# Altium PCB project_11.PcbDoc
Units mm, origin at the board's own origin, x right, y up, seen from the top; angles counter-clockwise.
Board outline 67.06 x 46.48 mm, 2 copper layers (Top Layer, Bottom Layer); 21 components, 44 nets, 105 pads, 4 vias.
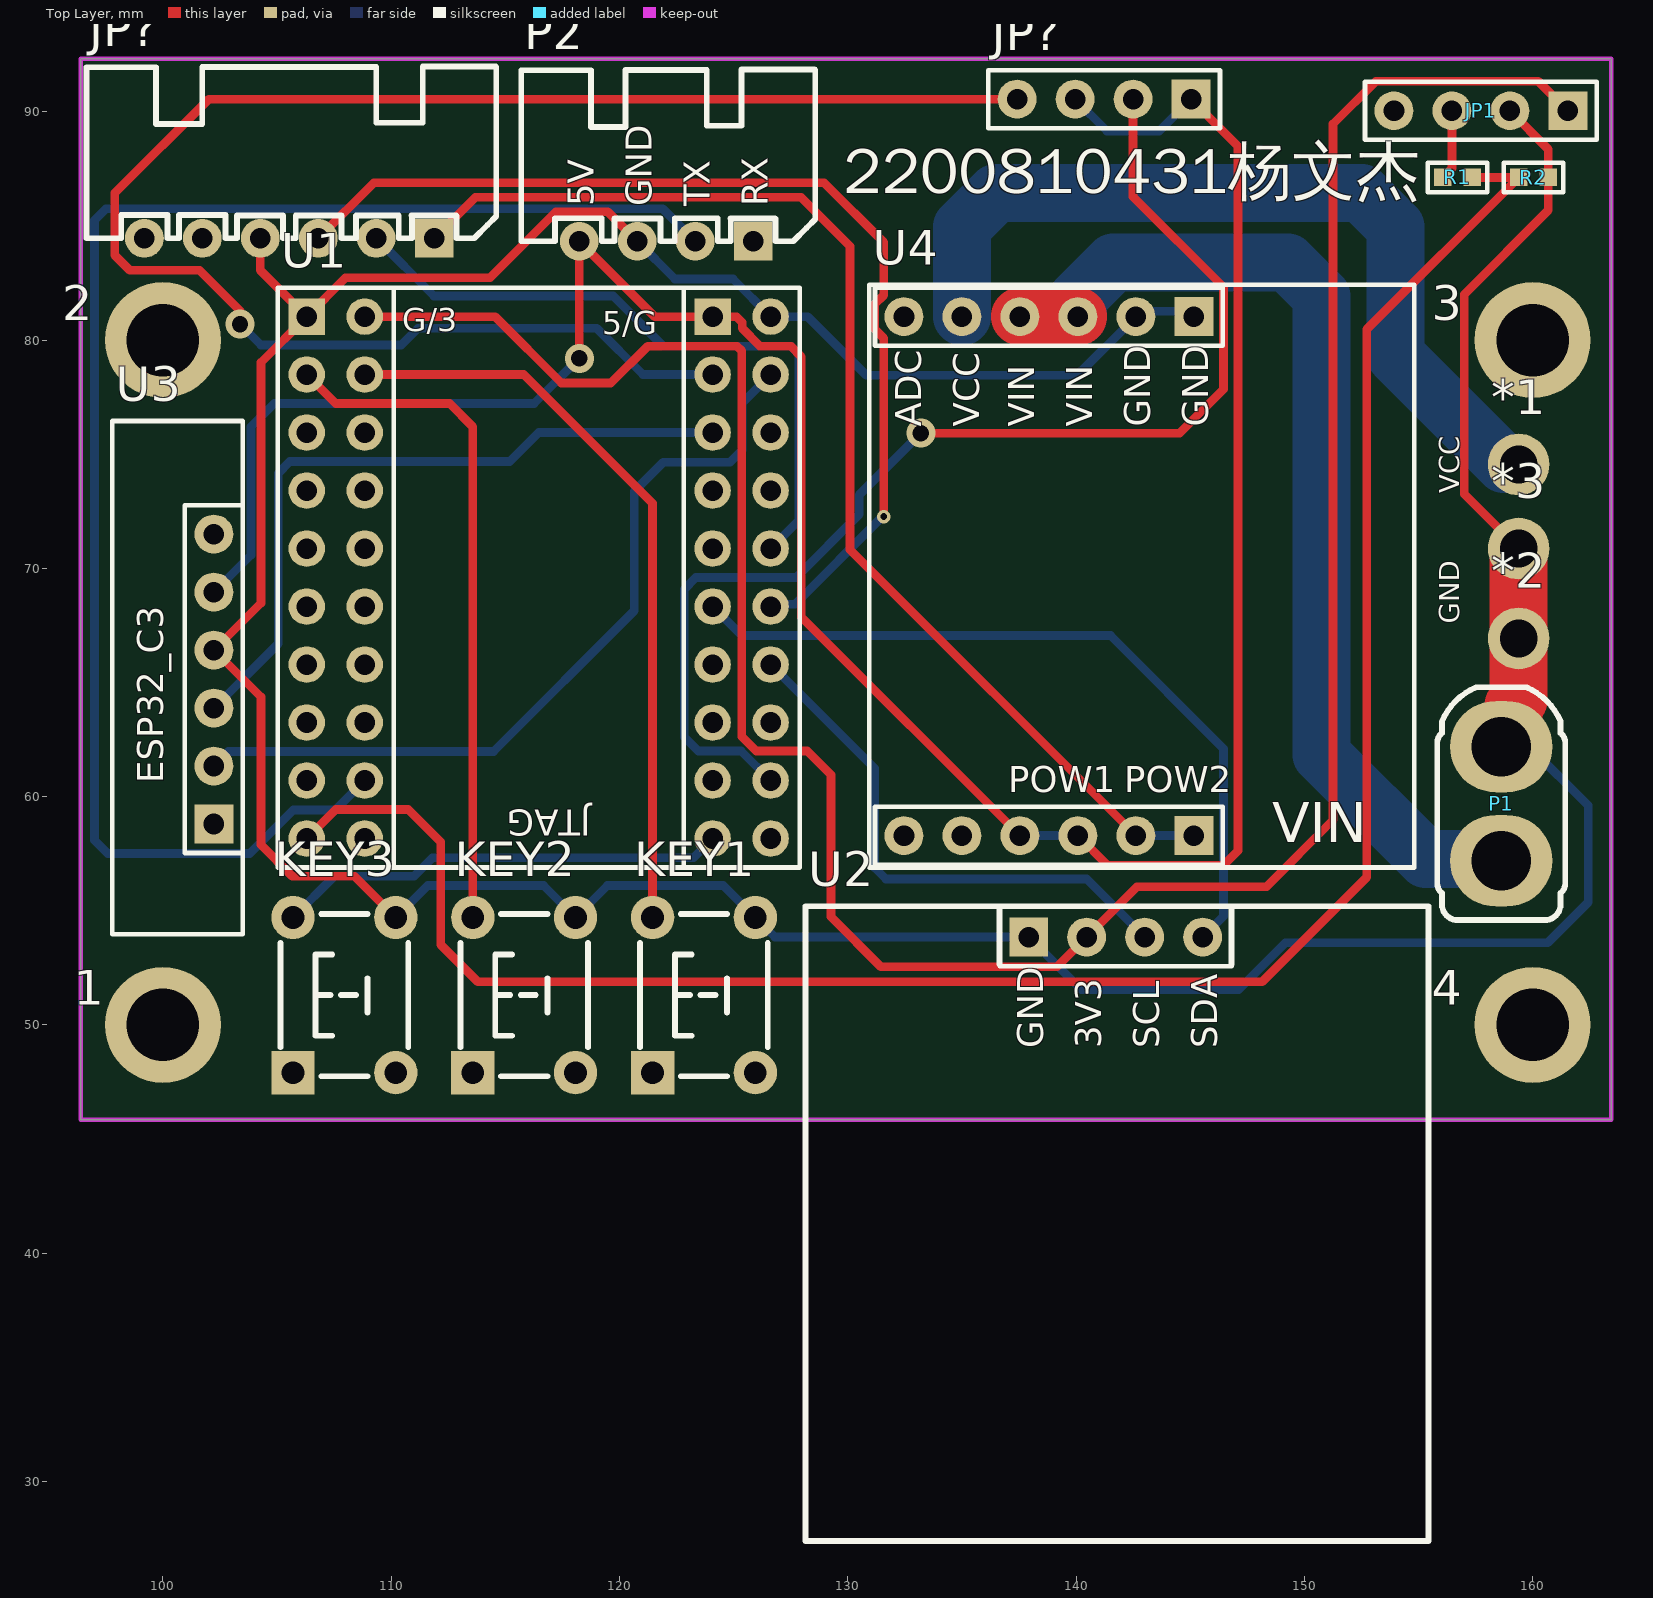
[diagram p0: Top Layer view]
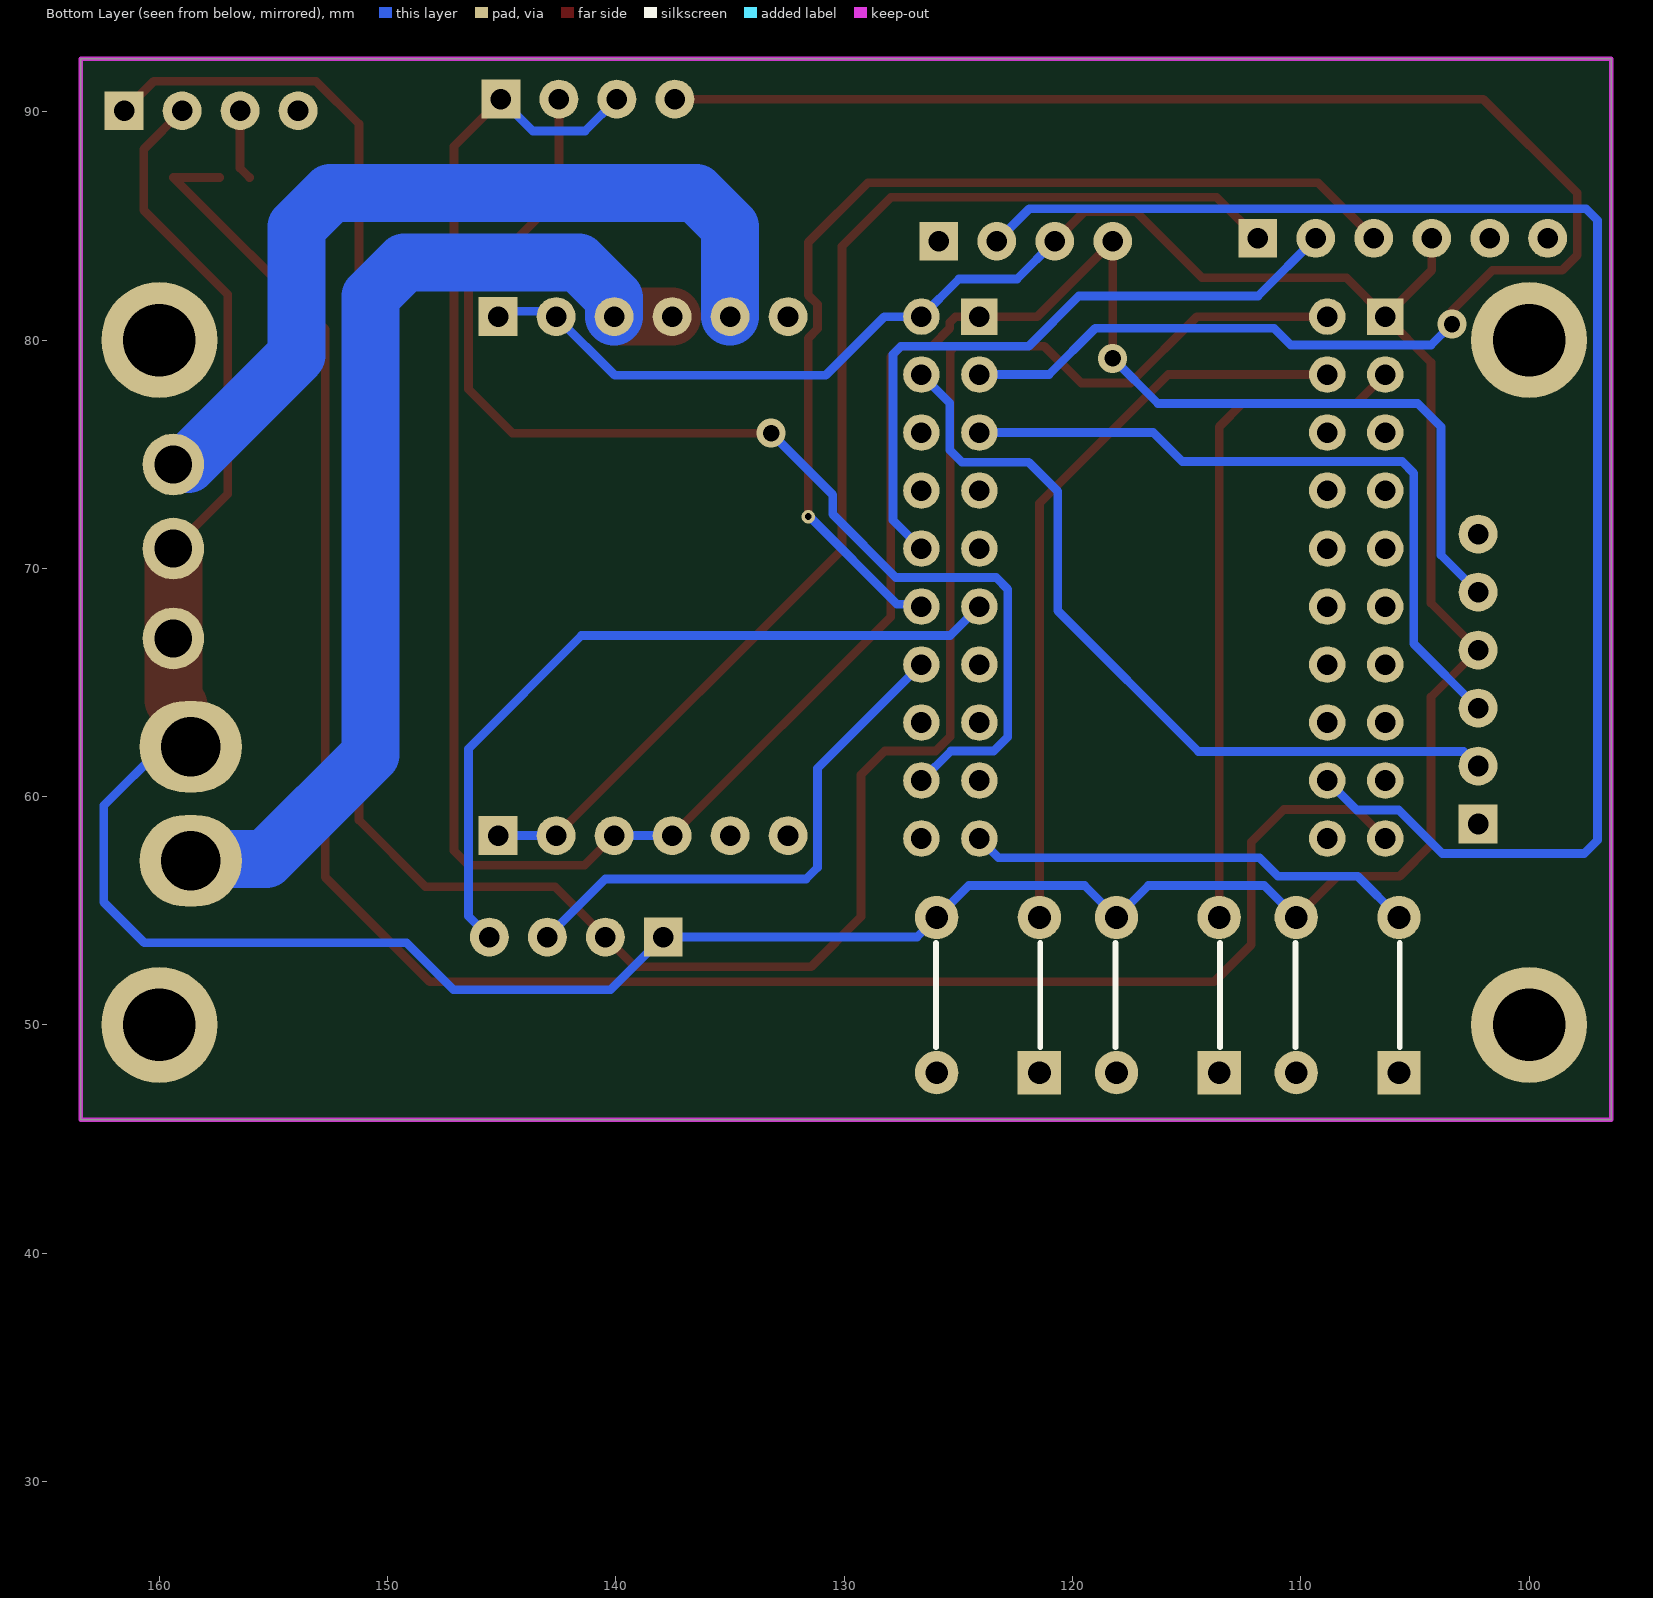
[diagram p1: Bottom Layer view, seen from below]

## Layer stack, top to bottom
Top Solder: solder mask 0.0102, Solder Resist, Dk 3.5
Top Layer: signal copper 0.0356
Dielectric 1: dielectric 0.32, FR-4, Dk 4.8
Bottom Layer: signal copper 0.0356
Bottom Solder: solder mask 0.0102, Solder Resist, Dk 3.5

## Board outline
96.393,45.847 96.393,92.329 163.449,92.329 163.449,45.847

## Design rules (kind name [scope] priority, off if disabled: settings)
Clearance [All] p1: gap=0.254 ignorepadtopadclearanceinfootprint=FALSE
PolygonConnect [All] p1: connectstyle=Relief reliefconductorwidth=0.254 reliefentries=4 polygonreliefangle="90 Angle" airgapwidth=0.254
RoutingVias [All] p1: holewidth=0.711 width=1.27 viastyle="Through Hole" minholewidth=0.711 minwidth=1.27 maxholewidth=0.711 maxwidth=1.27
SolderMaskExpansion [All] p1: expansion=0.102 istentingtop=FALSE
SupplyNets "Schematic Supply Nets_5" [InNet('5V_POW')] p1: voltage=0.000
SupplyNets "Schematic Supply Nets_4" [InNet('VIN')] p2: voltage=0.000
SupplyNets "Schematic Supply Nets_3" [InNet('VCC')] p3: voltage=0.000
SupplyNets "Schematic Supply Nets_2" [InNet('3V3')] p4: voltage=0.000
SupplyNets "Schematic Supply Nets_1" [InNet('5V')] p5: voltage=0.000
SupplyNets "Schematic Supply Nets" [InNet('GND')] p6: voltage=0.000
Width [All] p1: maxlimit=2.54 minlimit=0.254 preferedwidth=0.381 minimp=50.000000 maximp=50.000000 favimp=50.000000
30 further rules are at their usual default settings.

## Components (designator, comment, footprint, x,y, rotation, side; value= is the part's Value field where it differs from the comment)
1 "M3" "M3 125X200" 100,50 r90 top
2 "M3" "M3 125X200" 100,80 r90 top
3 "M3" "M3 125X200" 160,80 r90 top
4 "M3" "M3 125X200" 160,50 r90 top
*1 "CS" R100 159.385,74.549 r0 top
*2 "CS" R100 159.385,66.929 r0 top
*3 "CS" R100 159.385,70.866 r0 top
JP1 "HDR-1X4" HDR2.54-M-LI-4P 157.734,90.043 r180 top
JP? "HDR-1X4" HDR2.54-M-LI-4P 141.224,90.551 r180 top
JP? "HDR-1X6" XH2.54-WI-6P 105.537,84.455 r180 top
KEY1 "mod_buttom" MOD_BUTTOM 123.698,51.054 r90 top
KEY2 "mod_buttom" MOD_BUTTOM 115.824,51.054 r90 top
KEY3 "mod_buttom" MOD_BUTTOM 107.95,51.054 r90 top
P1 "port_xt30" MOD_XT30 158.623,59.69 r90 top
P2 "port_uart_4p" XH2.54_4P 122.174,88.265 r0 top
R1 "2K" "R 0603_L" 156.703,87.122 r0 top
R2 "2K" "R 0603_L" 160.035,87.122 r0 top
U1 "f1_hw_1_gw" F1_HW_1_GW 116.205,69.215 r90 top
U2 "mod_oled" MOD_OLED 141.857,53.801 r0 top
U3 "c3_hw_1" C3_HW_1 102.235,65.151 r90 top
U4 "pow_hw_3" POW_HW_3 139.446,72.517 r0 top

## Footprints (in the part's own frame and the unit in brackets; to place one, negate y for a bottom-side part, rotate by r counter-clockwise, add the part's x,y. Pads: shape width x height; smd on the part's side, far side on the other; paste and mask are expansions set on the pad)
C3_HW_1 [mm]
  rect 1.7x1.7 hole 0.9: 1(-6.35,0)
  round 1.7 hole 0.9: 2(-3.81,0) 3(-1.27,0) 4(1.27,0) 5(3.81,0) 6(6.35,0)
  silkscreen extent -11.18,-1.27 11.3,4.45, body extent -11.18,-1.27 11.3,4.45, height 8.5
F1_HW_1_GW [mm]
  rect 1.6x1.6 hole 0.9: 1(11.811,9.906) 21(11.811,-7.874)
  round 1.6 hole 0.9: 2(11.811,7.366) 3(9.271,9.906) 4(9.271,7.366) 5(6.731,9.906) 6(6.731,7.366) 7(4.191,9.906) 8(4.191,7.366) 9(1.651,9.906) 10(1.651,7.366) 11(-0.889,9.906) 12(-0.889,7.366) 13(-3.429,9.906) 14(-3.429,7.366) 15(-5.969,9.906) 16(-5.969,7.366) 17(-8.509,9.906) 18(-8.509,7.366) 19(-11.049,9.906) 20(-11.049,7.366) 22(11.811,-10.414) 23(9.271,-7.874) 24(9.271,-10.414) 25(6.731,-7.874) 26(6.731,-10.414) 27(4.191,-7.874) 28(4.191,-10.414) 29(1.651,-7.874) 30(1.651,-10.414) 31(-0.889,-7.874) 32(-0.889,-10.414) 33(-3.429,-7.874) 34(-3.429,-10.414) 35(-5.969,-7.874) 36(-5.969,-10.414) 37(-8.509,-7.874) 38(-8.509,-10.414) 39(-11.049,-7.874) 40(-11.049,-10.414)
  silkscreen extent -12.32,-11.68 13.08,11.18, body extent -12.38,-11.68 13.08,11.18, height 8.5
HDR2.54-M-LI-4P [mm] "排母，4脚"
  rect 1.7x1.7 hole 0.9: 1(-3.81,0)
  round 1.7 hole 0.9: 2(-1.27,0) 3(1.27,0) 4(3.81,0)
  silkscreen extent -5.08,-1.27 5.08,1.27, body extent -5.08,-1.27 5.08,1.27, height 8.5
"M3 125X200" [mm] "M3螺丝孔，孔125Mil，焊盘200Mil"
  round 5.08 hole 3.175: 1(0,0)
MOD_BUTTOM [mm]
  rect 1.9x1.9 hole 1: 1(-3.146,2.25)
  round 1.9 hole 1: 2(-3.146,-2.25) 3(3.654,-2.25) 4(3.654,2.25)
  silkscreen extent -3.3,-2.79 3.81,2.79, body extent -3.85,-3 4.36,3, height 4.25
MOD_OLED [mm] "外购屏幕模块接口"
  rect 1.7x1.7 hole 0.9: 1(-3.935,0.047)
  round 1.7 hole 0.9: 2(-1.395,0.047) 3(1.145,0.047) 4(3.685,0.047)
  silkscreen extent -13.72,-26.4 13.58,1.4, body extent -13.72,-26.42 13.59,1.4, height 8.5
MOD_XT30 [mm]
  oval 4x4.5 hole 2.6: 1(-2.5,0) 2(2.5,0)
  silkscreen extent -5.1,-2.8 5.1,2.8, body extent -5.1,-2.8 5.1,2.8, height 10.71
POW_HW_3 [mm]
  round 1.7 hole 0.9: 0(3.175,8.509) 1(-1.905,8.509) 1(0.635,8.509) 2(-4.445,8.509) 3(-6.985,-14.224) 3(-4.445,-14.224) 4(3.175,-14.224) 5(-1.905,-14.224) 5(0.635,-14.224) 6(-6.985,8.509)
  rect 1.7x1.7 hole 0.9: 0(5.715,8.509) 4(5.715,-14.224)
  silkscreen extent -8.51,-15.62 15.37,9.91, body extent -8.51,-15.62 15.37,9.91, height 8.5
R100 [mm] "R100探针焊盘"
  round 2.7 hole 1.651: 1(0,0)
"R 0603_L" [mil] "1/10W贴片电阻"
  rect 30x30 smd: 1(-25.59,0) 2(25.59,0)
  silkscreen extent -51,-26 51,26, body extent -31,-16 32,16, height 16
XH2.54-WI-6P [mm] "接插件，6P"
  rect 1.7x1.7 hole 0.9: 1(-6.35,0)
  round 1.7 hole 0.9: 2(-3.81,0) 3(-1.27,0) 4(1.27,0) 5(3.81,0) 6(6.35,0)
  silkscreen extent -9.07,-7.53 8.89,0, body extent -8.85,-7.35 8.85,0.35, height 5.75
XH2.54_4P [mm]
  rect 1.7x1.7 hole 0.9: 1(3.683,-3.937)
  round 1.7 hole 0.9: 2(1.143,-3.937) 3(-1.397,-3.937) 4(-3.937,-3.937)
  silkscreen extent -6.48,-3.94 6.4,3.59, body extent -6.44,-4.29 6.18,3.41, height 5.73

## Part data
1 2 3 4: library part prot_m3, "m3铜柱孔", BOM名称=铜柱孔, 学习资源=www.ooocke.com, 版权归属=源创客
*1 *2 *3: "探针焊盘", BOM名称=探针焊盘, 学习资源=www.ooocke.com, 版权归属=源创客
JP1 JP?: library part "Header 4", "4P接插件", BOM名称=4P接插件, 学习资源=www.ooocke.com, 版权归属=源创客
JP?: library part "Header 6", "6P接插件", BOM名称=6P接插件, 学习资源=www.ooocke.com, 版权归属=源创客
KEY1 KEY2 KEY3: "6*6*4.3按键"
P1: "XT30接口"
P2: "串口接口/SPP蓝牙模块 / XH2.54弯排针4p/4p排母"
R1 R2: library part 电阻, "贴片电阻1%精度"
U2: "oled模块 / 4p排母"
U3: "ESP32C3蓝牙模块 / 6p排母"
U4: "两路降压电源模块"

## Via types
v1: diameter 1.27, hole 0.711, Top Layer to Bottom Layer, 3 vias
v2: diameter 0.6, hole 0.3, Top Layer to Bottom Layer, 1 vias

## Nets (pads, with @x,y where several pads share a name; then routed paths per layer and width w, separated by ;. In a path a pad name is that pad's centre, name@x,y a point inside that pad or via, vN(x,y) a via of type N, cw(c..) or ccw(c..) an arc to the next point about the centre after c; other vN are vias at no path point)
3V3: JP1.1 U1.2 U2.2 | length 113.8
  Top Layer w0.381: U1.2 114.554,81.026 117.462,78.118 119.621,78.118 121.234,79.731 125.149,79.731 125.349,79.531 125.349,62.636 125.984,62.001 128.219,62.001 129.261,60.96 129.261,54.737 131.445,52.553 139.167,52.553 U2.2 142.672,56.058 148.336,56.058 151.257,58.979 151.257,89.459 153.137,91.338 160.249,91.338 JP1.1
5V: JP?.1@145.034,90.551 JP?.3@139.954,90.551 P2.4 U1.21 U3.5 U4.5 | length 115.9
  Top Layer w0.381: v1(118.237,79.197) P2.4 121.539,81.026 U1.21 125.12,81.026 125.374,80.772 125.374,80.511 126.154,79.731 127.508,79.731 127.965,79.273 127.965,67.869 U4.5@137.541,58.293 ; U4.5@140.081,58.293 141.376,56.998 146.456,56.998 147.091,57.632 147.091,88.494 JP?.1@145.034,90.551
  Bottom Layer w0.381: U3.5 103.861,70.587 103.861,76.2 104.877,77.216 116.256,77.216 v1(118.237,79.197) ; U4.5@137.541,58.293 U4.5@140.081,58.293 ; JP?.3@139.954,90.551 141.351,89.154 143.637,89.154 JP?.1@145.034,90.551
5V_POW: JP?.1@111.887,84.455 U4.4 | length 53.4
  Top Layer w0.381: JP?.1@111.887,84.455 113.69,86.258 127.953,86.258 130.099,84.112 130.099,70.815 U4.4@142.621,58.293
  Bottom Layer w0.381: U4.4@142.621,58.293 U4.4@145.161,58.293
BOOT0: U1.35
GND: *2.1 *3.1 JP1.2 JP?.4@104.267,84.455 KEY1.3 KEY2.3 KEY3.3 P1.2 P2.3 R2.2 U1.1 U1.22 U2.1 U3.4 U4.0 | length 181.2
  Top Layer w0.381: JP?.4@104.267,84.455 104.267,83.058 U1.1 ; KEY3.3 108.393,56.515 105.664,56.515 104.292,57.887 104.292,64.364 U3.4 104.292,68.478 104.292,79.02 U1.1 ; P2.3 119.482,85.623 117.22,85.623 114.325,82.728 108.001,82.728 U1.1 ; *2.1@158.623,66.167 *2.1 ; JP1.2 160.685,88.362 R2.2 160.685,85.679 156.997,81.991 156.997,73.254 *3.1
  Top Layer w2.54: P1.2 159.152,62.719 159.152,64.002 159.385,64.234 *2.1 *3.1
  Bottom Layer w0.381: KEY3.3 111.601,56.109 116.673,56.109 KEY2.3 119.475,56.109 124.547,56.109 KEY1.3 126.808,53.848 U2.1 140.233,51.537 147.117,51.537 149.174,53.594 160.655,53.594 162.433,55.372 162.433,59.609 159.852,62.19 P1.2 ; P2.3 122.428,82.677 124.968,82.677 U1.22 128.245,81.026 130.81,78.461 140.056,78.461 142.621,81.026 142.857,81.262 144.925,81.262 U4.0@145.161,81.026
NetJP1_3: JP1.3 R1.1 | length 3.1
  Top Layer w0.381: R1.1 156.464,87.533 JP1.3
NRST: U1.12
PA0: U1.20
PA1: R1.2 R2.1 U1.19 | length 90.1
  Top Layer w0.381: U1.19 107.569,59.436 110.744,59.436 112.166,58.014 112.166,53.518 113.792,51.892 148.158,51.892 152.73,56.464 152.73,80.467 R2.1 R1.2
PA2: P2.2 U1.18 | length 67.7
  Bottom Layer w0.381: U1.18 107.543,59.411 105.715,59.411 103.81,57.506 97.587,57.506 97.003,58.09 97.003,85.242 97.511,85.75 121.895,85.75 P2.2
PA3: U1.17
PA4: U1.16
PA5: U1.15
PA6: U1.14
PA7: U1.13
PA8: JP?.4@137.414,90.551 U1.23 | length 73.3
  Top Layer w0.381: v1(103.378,80.696) 103.378,81.28 101.6,83.058 98.552,83.058 97.892,83.718 97.892,86.436 102.006,90.551 JP?.4@137.414,90.551
  Bottom Layer w0.381: v1(103.378,80.696) 104.292,79.781 110.439,79.781 111.176,80.518 118.999,80.518 121.031,78.486 U1.23
PA9: U1.24 U3.2 | length 35.8
  Bottom Layer w0.381: U3.2 102.87,61.976 114.478,61.976 120.65,68.148 120.65,73.381 121.92,74.651 124.841,74.651 125.374,75.184 125.374,77.241 U1.24
PA10: U1.25 U3.3 | length 31.2
  Bottom Layer w0.381: U3.3 105.054,66.7 105.054,74.168 105.562,74.676 115.189,74.676 116.459,75.946 U1.25
PA11: U1.26
PA12: U1.27
PA13: U1.28
PA14: U1.29
PA15: JP?.2@109.347,84.455 U1.30 | length 29.6
  Bottom Layer w0.381: JP?.2@109.347,84.455 111.874,81.928 119.723,81.928 121.92,79.73 127.508,79.73 127.864,79.375 127.864,72.111 U1.30
PB0: U1.11
PB1: U1.9
PB2: U1.10
PB3: JP?.3@106.807,84.455 U1.32 | length 45.8
  Top Layer w0.381: JP?.3@106.807,84.455 109.245,86.893 128.957,86.893 131.572,84.277 131.572,81.968 131.166,81.562 131.166,80.49 131.572,80.084 v2@131.572,72.238
  Bottom Layer w0.381: U1.32 126.725,68.432 127.69,68.432 v2@131.513,72.255
  other v2: 131.572,72.263
PB4: U1.31 U2.4 | length 33.6
  Bottom Layer w0.381: U1.31 125.349,67.056 141.503,67.056 146.456,62.103 146.456,54.762 U2.4
PB5: U1.34 U2.3 | length 23.9
  Bottom Layer w0.381: U1.34 131.166,61.239 131.166,56.896 131.674,56.388 140.462,56.388 U2.3
PB6: U1.33
PB7: U1.36
PB8: JP?.2@142.494,90.551 U1.38 | length 53.1
  Top Layer w0.381: v1(133.198,75.921) 144.526,75.921 146.456,77.85 146.456,82.321 142.494,86.282 JP?.2@142.494,90.551
  Bottom Layer w0.381: U1.38 125.324,62.001 123.444,62.001 122.834,62.611 122.834,69.088 123.342,69.596 127.737,69.596 130.505,72.365 130.505,73.228 v1(133.198,75.921)
PB9: U1.37
PB10: U1.7
PB11: U1.8
PB12: U1.5
PB13: U1.6
PB14: KEY2.4 U1.3 | length 29.7
  Top Layer w0.381: U1.3 107.569,77.216 112.558,77.216 113.574,76.2 KEY2.4
PB15: KEY1.4 U1.4 | length 33.1
  Top Layer w0.381: U1.4 115.811,78.486 121.448,72.849 KEY1.4
PC13: KEY3.4 U1.39 | length 19.8
  Bottom Layer w0.381: KEY3.4 107.507,56.515 110.998,56.515 111.811,57.328 123.241,57.328 U1.39
USART2_RX: P2.1
VBAT: U1.40
VCC: *1.1 U4.2 | length 37.1
  Bottom Layer w2.54: U4.2 135.001,84.954 136.489,86.442 152.493,86.442 153.981,84.954 153.981,79.345 158.746,74.58 159.354,74.58 *1.1
VIN: P1.1 U4.1 | length 45.2
  Top Layer w2.54: U4.1@137.541,81.026 U4.1@140.081,81.026
  Bottom Layer w2.54: U4.1@140.081,81.026 140.081,81.843 141.638,83.4 149.261,83.4 150.749,81.912 150.749,61.849 155.322,57.276 158.537,57.276 P1.1
pads on no net: 1.1 2.1 3.1 4.1 JP1.4 JP?.5 JP?.6 KEY1.1 KEY1.2 KEY2.1 KEY2.2 KEY3.1 KEY3.2 U3.1 U3.6 U4.3 U4.6

## Keep-outs
Keep-Out Layer:
  the board outline again, w0.2

## Silkscreen, mask and mechanical layers (free items; w line width, h text height)
Top Overlay:
  text "2200810431杨文杰" at 129.796,85.748 h3.5
  text "VCC" at 157.083,73.28 h1.5 r90
  text "GND" at 157.083,67.564 h1.5 r90

## Text inside footprints (layer, text, board x,y; h text height)
P2: Top Overlay "5V" at 118.872,85.852 h1.14 r90; Top Overlay "GND" at 121.412,85.852 h1.14 r90; Top Overlay "TX" at 123.952,85.852 h1.14 r90; Top Overlay "RX" at 126.492,85.852 h1.14 r90
U1: Top Overlay "JTAG" at 118.745,59.436 h1.14 r180; Top Overlay "G/3" at 110.49,80.391 h1; Top Overlay "5/G" at 119.253,80.264 h1
U2: Top Overlay "3V3" at 141.095,48.975 h1.14 r90; Top Overlay "SCL" at 143.635,48.975 h1.14 r90; Top Overlay "SDA" at 146.175,48.975 h1.14 r90; Top Overlay "GND" at 138.555,48.975 h1.14 r90
U3: Top Overlay "ESP32_C3" at 100.013,60.579 h1.14 r90
U4: Top Overlay "POW1" at 137.033,60.198 h1.14; Top Overlay "POW2" at 142.113,60.198 h1.14; Top Overlay "GND" at 143.256,76.2 h1.14 r90; Top Overlay "GND" at 145.796,76.2 h1.14 r90; Top Overlay "VIN" at 138.176,76.2 h1.14 r90; Top Overlay "VIN" at 140.716,76.2 h1.14 r90; Top Overlay "ADC" at 133.223,76.2 h1.14 r90; Top Overlay "VCC" at 135.763,76.2 h1.14 r90; Top Overlay "VIN" at 148.592,57.404 h3